# Altium PCB base-board.PcbDoc (part 2 of 2)
Units mil, origin at the board's own origin, x right, y up, seen from the top; angles counter-clockwise.
Board outline 2347.19 x 3917.24 mil, 2 copper layers (Top Layer, Bottom Layer); 55 components, 32 nets, 216 pads, 60 vias.
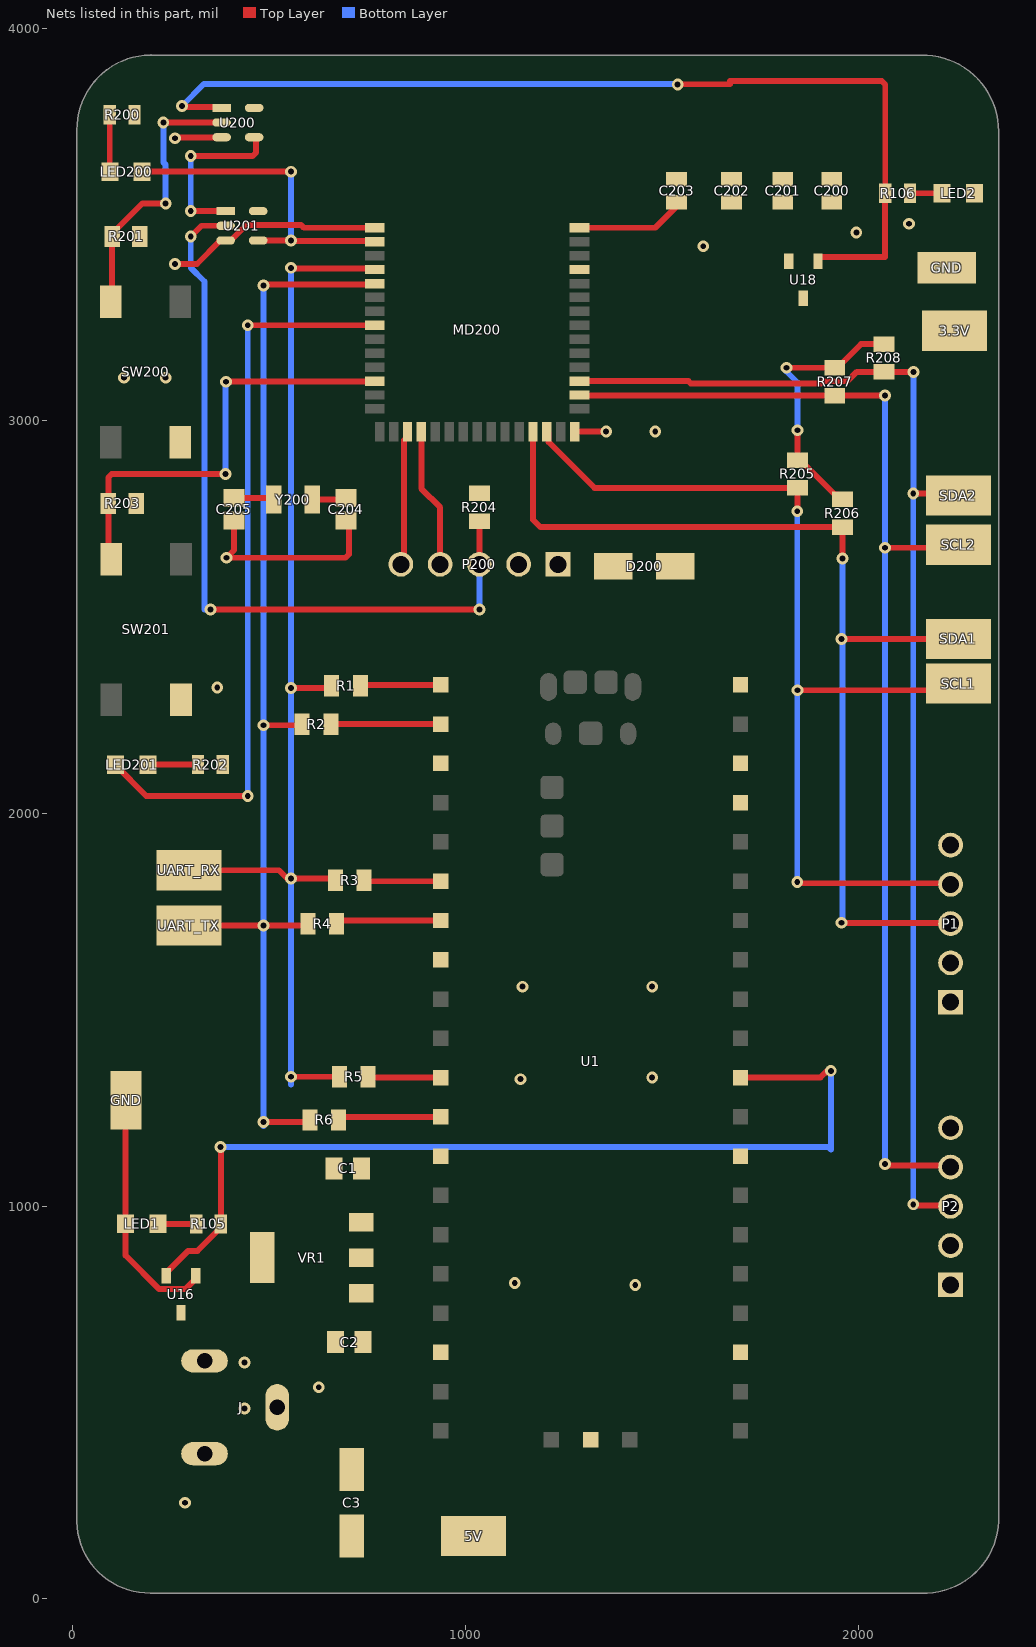
[diagram p2: the nets of this part, all layers, seen from the top]

## Part data
3.3V 5V SCL1 SCL2 SDA1 SDA2 UART_RX UART_TX: "Test Point SMD 1206", Case Size=1206, Manufacturer="TE Connectivity (Tyco Electronics)", Manufacturer Part Number=1625854-1, Operating Temperature="-55 to 125 C", Power Rating=N/R, Resistance Value="0 Ohm", Supplier Part Number=A106143CT-ND, ComponentLink1Description=https://datasheet.ciiva.com/6439/eng-ds-1773266-a-6439169.pdf, ComponentLink1URL=https://datasheet.ciiva.com/6439/eng-ds-1773266-a-6439169.pdf, ComponentLink2Description=https://datasheet.ciiva.com/30136/1773266-a-30136341.pdf, ComponentLink2URL=https://datasheet.ciiva.com/30136/1773266-a-30136341.pdf, ComponentLink3Description=https://datasheet.ciiva.com/6439/eng-ds-1773266-a-6439080.pdf, ComponentLink3URL=https://datasheet.ciiva.com/6439/eng-ds-1773266-a-6439080.pdf, ComponentLink4Description=https://datasheet.ciiva.com/6439/eng-ds-1773266-a-6439081.pdf, ComponentLink4URL=https://datasheet.ciiva.com/6439/eng-ds-1773266-a-6439081.pdf, ComponentLink5Description=https://datasheet.ciiva.com/6439/eng-ds-1773266-a-6439083.pdf, ComponentLink5URL=https://datasheet.ciiva.com/6439/eng-ds-1773266-a-6439083.pdf, Dimension="3.2 x 1.6 x 1.25mm", Family=RC, Mounting="Surface Mount", Packaging="Tape and Reel", Part No=1625854-1, Pricing 1="1=0.28, 10=0.261, 25=0.224, 50=0.1902, 100=0.1828, 250=0.1641, 500=0.1567, 1000=0.1306 (USD)", RoHS=Yes, Stock 1=31937, Supplier=Digi-Key, Temperature Coefficient=N/R, Terminal Pitch=N/R, Termination Style=N/R, Tolerance=N/R
C1 C2: "10ÂµF Â±10% 16V Ceramic Capacitor X5R 0805 _2012 Metric_", Package="0805 Samsung", Digi-Key_Part_Number=1276-6455-1-ND, Digi-Key_Purchase_URL=https://www.digikey.com/product-detail/en/samsung-electro-mechanics/CL21A106KOQNNNG/1276-6455-1-ND/5958083?utm_source=snapeda&utm_medium=aggregator&utm_campaign=symbol, MF="Samsung Electro-Mechanics", MP=CL21A106KOQNNNG, SnapEDA_Link=https://www.snapeda.com/parts/CL21A106KOQNNNG/Samsung%20Electro-Mechanics/view-part/3597829/?ref=snap
C3: library part CMP-05427-000047-1, "CAP ALUM 100UF 20% 10V SMD", Capacitance=100uF, Case/Package=Radial, Max Operating Temperature=85°C, Min Operating Temperature=-40°C, Package Quantity=1, Ripple Current=50mA, Tolerance=20%, Voltage Rating=10V, Construction=Cylindrical, Contact Plating=Tin, Diameter=5mm, Height=5.4mm, Height - Seated (Max)=0.213inch, Lead Free="Lead Free", Length=5.5mm, Life (Hours)=1000Hour, Mount="Surface Mount", Packaging="Tape and Reel", Radiation Hardening=No, Ripple Current (AC)=50mA, RoHS Compliant=Yes, Series=S, Termination=SMD/SMT, Voltage Rating (DC)=10V
C200 C201: library part CMP-2007-03243-2, "CAP CER 10UF 10V X5R 0805", 3DS Part Number=220-00001, Capacitance=10uF, Manufacturer=Kemet, Package=C0805C-DG, Temperature="-55°C to +85°C", Temperature Characteristic=X5R, Temperature Coefficient=15%, Temperature Range High=+85°C, Temperature Range Low=-55°C, Tolerance=10%, Voltage=10V, Automotive=No, Category=Cap, ComponentLink2Description=Datasheet, ComponentLink2URL=https://content.kemet.com/datasheets/KEM_C1006_X5R_SMD.pdf, Device Class L1="Passive Components", Device Class L2=Capacitors, Device Class L3="Ceramic Capacitors", Digikey Description="CAP CER 10UF 10V X5R 0805", Height=1.4mm, Ipc Land Pattern Name=CAPC200125X125, Lead Free=Yes, Manufacturer Part Number=C0805C106K8PACTU, Material=Ceramic, Mouser Description="CAP CER 10UF 10V X5R 0805", Octopart=https://octopart.com/c0805c106k8pactu-kemet-98697, RoHS=TRUE, Voltage Rating=10V
C202 C203: library part CMP-2007-00279-2, "CAP CER 0.1UF 50V X7R 0805", Capacitance="0.10 μF", Manufacturer=KEMET, Package=C0805C-DN, Temperature="-55°C to +125°C", Temperature Characteristic=X7R, Temperature Coefficient=30ppm/°C, Temperature Range High=+125°C, Temperature Range Low=-55°C, Tolerance=0.1, Voltage Rating="50 V", Automotive=No, Category=Cap, ComponentLink2Description=Datasheet, ComponentLink2URL=https://content.kemet.com/datasheets/KEM_C1003_C0G_SMD.pdf, Device Class L1="Passive Components", Device Class L2=Capacitors, Device Class L3="Ceramic Capacitors", Digikey Description="CAP CER 0.1UF 50V X7R 0805", Height=0.88mm, Ipc Land Pattern Name=CAPC200125X78, Lead Free=Yes, Manufacturer Part Number=C0805C104K5RACTU, Material=Ceramic, Mouser Description="Cap Ceramic 0.1uF 50V X7R 10% SMD 2.0 x 1.2 mm 125 C Paper T/R", Octopart=https://octopart.com/c0805c104k5ractu-kemet-143926, RoHS=TRUE
C204 C205: library part CMP-2007-04344-1, Manufacturer="AVX Interconnect / Elco", Part Number=08055A6R0CAT2A
D200: library part CMP-2000-05096-2, "DIODE SCHOTTKY 40V 1A SMA", Average Rectified Current=1A, Capacitance=110pF, Case/Package=SMA, Forward Voltage=500mV, Max Forward Surge Current (Ifsm)=30A, Max Operating Temperature=150°C, Max Repetitive Reverse Voltage (Vrrm)=40V, Max Reverse Current=500uA, Min Operating Temperature=-65°C, Package Quantity=5000, Contact Plating=Tin, Current Rating=1A, Element Configuration=Single, Forward Current=1A, Height=2.1mm, Lead Free="Lead Free", Length=4.6mm, Max Reverse Voltage (DC)=40V, Mount="Surface Mount", Number of Pins=2, Output Current=1A, Packaging="Cut Tape", Peak Non-Repetitive Surge Current=30A, Polarity=Standard, Radiation Hardening=No, REACH SVHC="No SVHC", RoHS Compliant=Yes, Series=B140, Termination=SMD/SMT, Voltage Rating (DC)=40V, Weight=0.004233oz, Width=2.92mm
GND GND: library part CMP-1672-00008-1, "Test Point, 1 Position SMD, RoHS, Tape and Reel", Package Quantity=1000, ComponentLink1Description="Manufacturer URL", ComponentLink1URL=http://www.keyelco.com/, ComponentLink2Description=Datasheet, ComponentLink2URL=http://www.keyelco.com/product-pdf.cfm?p=1357, Contact Plating=Silver, DatasheetVersion=03/2014, Mount="Surface Mount", Mounting Technology="Surface Mount", PackageDescription="1-Pin Surface Mount Device, Body 3.81 x 2.03 mm", PackageReference=5019, Packaging="Tape and Reel", Pins=1, RoHSCompliant=True
J: "2.0 x 6.5 mm, 5.0 A, Horizontal, Through Hole, Tapered Pins, Dc Power Jack Connector", Package=None, CUI_purchase_URL=https://www.cuidevices.com/product/interconnect/connectors/dc-power-connectors/jacks/pj-102ah?utm_source=snapeda.com&utm_medium=referral&utm_campaign=snapedaBOM, Digi-Key_Part_Number=CP-102AH-ND, Digi-Key_Purchase_URL=https://www.digikey.com/product-detail/en/cui-devices/PJ-102AH/CP-102AH-ND/408448?utm_source=snapeda&utm_medium=aggregator&utm_campaign=symbol, MF="CUI Devices", MP=PJ-102AH, SnapEDA_Link=https://www.snapeda.com/parts/PJ-102AH/CUI%20Devices/view-part/228264/?ref=snap
LED1 LED2 LED200: library part CMP-1426-00011-1, "SMD mono-color Chip LED, WL-SMCW, Red", Color=Red, Manufacturer="Wuerth Elektronik", ComponentLink1Description="Manufacturer URL", ComponentLink1URL=http://www.we-online.com, ComponentLink2Description=Datasheet, ComponentLink2URL=http://katalog.we-online.com/led/datasheet/150080RS75000.pdf, PackageReference=0805_A, PartNumber=150080RS75000
LED201: library part CMP-1426-00007-1, "SMD mono-color Chip LED, WL-SMCW, Green", Color=Green, Manufacturer="Wuerth Elektronik", ComponentLink1Description="Manufacturer URL", ComponentLink1URL=http://www.we-online.com, ComponentLink2Description=Datasheet, ComponentLink2URL=http://katalog.we-online.com/led/datasheet/150080GS75000.pdf, PackageReference=0805_A, PartNumber=150080GS75000
MD200: library part CMP-12964-000002-1, "RF TXRX MOD BLUETOOTH TRACE ANT", Manufacturer="Cypress Semiconductor", Max Frequency=2.5GHz, Max Supply Voltage=3.6V, Min Supply Voltage=1.71V, Package=0, Receiving Current=6.7mA, Temperature="-40°C to +85°C", Temperature Range High=+85°C, Temperature Range Low=-40°C, Transmitting Current=5.7mA, Automotive=No, Bandwidth=100MHz, Category=UNK, ComponentLink2Description=Datasheet, ComponentLink2URL=https://www.cypress.com/file/428336/download, Data Rate=2Mbits/s, Device Class L1="Integrated Circuits (ICs)", Device Class L2="RF Semiconductors and Devices", Device Class L3=Transceivers, Digikey Description="RF TXRX MOD BLUETOOTH TRACE ANT", Height=2mm, Interface=I2C,SPI,UART,I2S,Other, Lead Free=Yes, Manufacturer Part Number=CYBLE-416045-02, Number Of Adc Channels=1, Number Of Gpio=36, Octopart=https://octopart.com/cyble-416045-02-cypress+semiconductor-96386825, RoHS=TRUE
P1 P2 P200: library part CMP-1502-01068-1, "THT Vertical Pin Header WR-PHD, Pitch 2.54 mm, Single Row, 5 pins", Contact Resistance=20mOhm, Manufacturer="Wurth Elektronik", Operating Temperature=-40to105degC, Rated Current=3A, Withstanding Voltage=500VAC, Working Voltage=250VAC, Datasheet URL=https://katalog.we-online.de/em/datasheet/6130xx11121.pdf, Gender=Male, Manufacturer URL=http://www.we-online.de, Mounting Technology=THT, Orientation=Vertical, Package Reference=61300511121, Packaging=Bag, Part Number=61300511121, Pin Number=5, Pitch=2.54mm, Publisher=WurthElektronik, Row Number=Single
R1 R2 R3 R4 R5 R6: library part RMCF0805ZT0R00, "0 Ohms Jumper 0.125W, 1/8W Chip Resistor 0805 (2012 Metric) Automotive AEC-Q200 Thick Film", Package="0805 Stackpole Electronics", Availability=Unavailable, DigiKey-Purchase-URL=https://snapeda.com/shop?store=DigiKey&id=492501, MF="Stackpole Electronics", MP=RMCF0805ZT0R00, Price=None, SnapEDA_Link=https://www.snapeda.com/parts/RMCF0805ZT0R00/Stackpole%20Electronics%20Inc/view-part/492501/?ref=snap
R105 R106 R200 R202: library part CMP-2000-06960-1, "Chip Resistor, 330 Ohm, +/- 1%, 125 mW, -55 to 155 degC, 0805 (2012 Metric), RoHS, Tape and Reel", Case Code - in=0805, Case Code - mm=2012, Manufacturer=Yageo, Operating Temperature Range=-55Cto+155C, Package Description="2-Pin Surface Mounted Device, Body 2 x 1.25 mm", Power Rating=125mW(1/8W), Resistance=330Ohms, Temperature Coefficient=100PPM/C, Tolerance=1%, Voltage Rating=150V, Datasheet URL=http://www.yageo.com/documents/recent/PYu-RC_Group_51_RoHS_L_7.pdf, Datasheet Version="Rev. 7, 05/2017", Manufacturer URL=http://www.yageo.com/, Mounting Technology=SurfaceMount, Package Reference=0805, Packaging=Reel, Product=ThickFilmResistorsGeneralPurpose, Series=RC, Termination Style=SMD/SMT
R201 R203 R204 R205 R206 R207 R208: library part CMP-1659-00013-4, "Chip Resistor, 10 KOhm, +/- 1%, 0.125 W, -55 to 155 degC, 0805 (2012 Metric), RoHS, Tape and Reel", Manufacturer=Yageo, Max Operating Temperature="155 degC", Min Operating Temperature="-55 degC", Package Quantity=5000, Voltage Rating="150 V", ComponentLink1Description="Manufacturer URL", ComponentLink1URL=http://www.yageo.com/, ComponentLink2Description=Datasheet, ComponentLink2URL=http://www.yageo.com/documents/recent/PYu-RC_Group_51_RoHS_L_04.pdf, DatasheetVersion="Rev. 4, 02/2016", Height="0.5 mm", Length="2 mm", Mount="Surface Mount", Mounting Technology="Surface Mount", PackageDescription="2-Pin Surface Mounted Device, Body 2 x 1.25 mm", PackageReference=0805, Packaging="Tape and Reel", Pins=2, REACH SVHC="No SVHC", RoHSCompliant=true
SW200 SW201: library part CMP-2000-05602-2, "Swicth, SPST, 24 V, -35 to 85 degC, 4-Pin SMD, RoHS, Tape and Reel", Case\/Package=SMD/SMT, Contact Current Rating=50mA, Contact Resistance=100mOhm, Manufacturer="TE Connectivity", Max Operating Temperature=85degC, Max Voltage Rating (DC)=12V, Min Operating Temperature=-35degC, Operating Force=1.57N, Package Description="4-Pin Surface Mount Device, Body 6 x 6 mm, Pitch 4.5 mm", Package Quantity=750, Voltage Rating=24V, Actuator Length=0.055inch, Actuator Material=Polyamide, Contact Material=CopperAlloy, Contact Plating=Silver, Current Rating=50mA, Datasheet URL=http://www.te.com/commerce/DocumentDelivery/DDEController?Action=showdoc&DocId=Customer+Drawing%7F2-1437565-7%7FV%7Fpdf%7FEnglish%7FENG_CD_2-1437565-7_V.pdf%7F4-1437565-2, Datasheet Version="Rev. V, 02/2015", Electrical Life=100000Cycles, Illumination Type=Illuminated, Length=6mm, Manufacturer URL=http://www.te.com/, Mechanical Life=100000Cycles, Mount=SurfaceMount, Mounting Technology=SurfaceMount, Orientation=Straight, Package Reference=FSM4JSMA, Packaging=LoosePiece, REACH SVHC=Unknown, RoHSCompliant=true, Switch Travel=0.25mm, Termination=GullWing, Throw Configuration=SPST, Voltage Rating (DC)=24V, Width=6mm
U1: "RP2040 Raspberry Pi Pico - ARM Cortex-M0+ MCU 32-Bit Embedded Evaluation Board", Package=None, Availability=Unavailable, MP=SC0915, Price=None
U200 U201: library part CMP-04903-000082-1, "IC GATE AND 1CH 2-INP SOT23-5", Logic Function="AND GATE", RoHS Compliant=Yes
VR1: Package=None, Availability=Unavailable, MP=TS2937CW33_RPG, Price=None
Y200: library part CMP-2000-07587-2, "CRYSTAL 32.7680KHZ 6PF SMD", Case/Package=SMD/SMT, ESR (Equivalent Series Resistance)=55kR, Frequency=32.768kHz, Frequency Tolerance=20ppm, Load Capacitance=6pF, Max Operating Temperature=85°C, Min Operating Temperature=-40°C, Operating Frequency="32.768 kHz", Package Quantity=3000, Series Resistance=60kR, Depth=1.5mm, Height=0.035inch, Lead Free="Lead Free", Length=3.2mm, Mount="Surface Mount", Number of Pins=2, Packaging="Tape and Reel", Radiation Hardening=No, REACH SVHC="No SVHC", RoHS Compliant=Yes, Series=ABS07, Termination=SMD/SMT, Tolerance=20ppm, Width=0.061inch

## Via types
v1: diameter 30, hole 15, Top Layer to Bottom Layer, 60 vias

## Nets (pads, with @x,y where several pads share a name; then routed paths per layer and width w, separated by ;. In a path a pad name is that pad's centre, name@x,y a point inside that pad or via, vN(x,y) a via of type N, cw(c..) or ccw(c..) an arc to the next point about the centre after c; other vN are vias at no path point)
3.3V: 3.3V.1 C1.2 C200.1 C201.1 C202.1 C203.1 D200.1 MD200.4 R200.2 R201.2 R203.2 R204.2 R205.1 R206.1 R207.1 R208.1 U18.3 U200.5 U201.5 VR1.3 | length 679.3
  Top Layer w15: v1(1817.24,3135.43) R207.1@1940,3135.43 1946.89,3135.43 2007.32,3195.87 R208.1@2065,3195.87 ; v1@1847.91,2973.35 v1(1845,2976.26) R205.1@1845,2900.43 1851.89,2900.43 1939.7,2812.62 1947.26,2812.62 R206.1@1959.45,2800.43
  Bottom Layer w15: v1(1817.24,3135.43) 1817.24,3125.96 1845,3098.21 v1(1845,2976.26)
3V3_PWR_GOOD: R106.2 U18.1 U200.1 | length 2552.7
  Top Layer w15: v1(277.55,3802.4) 280.05,3799.9 381.14,3799.9 U200.1@383.64,3797.4 ; v1(1540,3856.99) 1540.48,3857.47 1672.76,3857.47 1672.76,3865.71 2059.72,3865.71 2068.5,3856.92 R106.2@2068.5,3580 2067.95,3579.45 2067.95,3417.8 1901.71,3417.8 1897.4,3413.48 U18.1@1897.4,3407.24
  Bottom Layer w15: v1(277.55,3802.4) 333.35,3858.2 1538.79,3858.2 v1(1540,3856.99)
5V_PWR_GOOD: R105.2 U1.30 U16.2 | length 2394.2
  Top Layer w15: U16.2@237.6,823.19 237.6,831.06 293.17,886.63 316.99,886.63 376.5,946.14 R105.2@376.5,955 376.5,1150.05 v1(375.77,1150.77) v1@375.04,1151.5 ; U1.30@1699.92,1327.87 1903.4,1327.87 1920.53,1345 v1(1930,1345)
  Bottom Layer w15: v1(375.77,1150.77) 1924.23,1150.77 1930,1145 v1(1930,1345)
+5: 5V.1 C2.1 C3.2 J.1 P1.5 P2.5 U1.40 U16.3 VR1.1
GND: C1.1 C2.2 C3.1 C200.2 C201.2 C202.2 C203.2 C204.1 C205.1 GND.1 J.2 J.3 LED1.1 LED2.1 MD200.1 MD200.15 MD200.43 P1.1 P1.2 P2.1 P2.2 P200.2 R202.1 SW200.3 SW201.3 U1.3 U1.8 U1.13 U1.18 U1.23 U1.28 U1.37 U1.38 U1.D2 U16.1 U18.2 U200.3 U201.3 VR1.2 VR1.4 | length 2170.7
  Top Layer w15: GND.1@135,1270 133.66,1268.66 LED1.1@133.66,955.55 133.66,875.12 219.78,789 286.09,789 312.4,815.31 U16.1@312.4,823.19 ; v1(260,3400) 315.67,3400 375.39,3459.72 U201.3@388.64,3459.72 401.89,3459.72 441.39,3499.22 580.94,3499.22 588.04,3492.13 MD200.43@768.82,3492.13 ; v1(260,3720) 261.46,3721.46 382.5,3721.46 U200.3@383.64,3722.6 ; C205.1@410,2746.46 410,2671 v1(390.79,2651.79) 693.92,2651.79 702.71,2660.58 702.71,2738.75 C204.1@695,2746.46 ; MD200.15@1277.83,2972.87 1278.31,2973.35 v1(1357.8,2973.35) ; MD200.1@1290,3492.13 1482.79,3492.13 C203.2@1542.4,3551.73
  other v1: 285.3,245 437.03,485 625.94,539.17 437.03,602.01 1431.97,799.45 1125,804.45 1140,1323.76 1475,1327.87 1145,1559.37 1475,1559.37 367.28,2321.34 1482.79,2972.87 130,3110 236.02,3110 1605,3445 1995,3480 2128.73,3502.33
I2C1_SCL: MD200.17 P1.4 R205.2 SCL1.1 | length 2525.2
  Top Layer w15: MD200.17@1206.97,2972.87 1211.48,2968.37 1211.48,2946.29 1328.19,2829.57 R205.2@1845,2829.57 1845,2770.59 v1(1844.41,2770) ; v1(1844.41,1825.59) 1847.2,1822.8 2232.2,1822.8 P1.4@2235,1820 ; v1(1845,2314.33) 2238.27,2314.33 SCL1.1@2255,2331.06
  Bottom Layer w15: v1(1844.41,2770) v1(1844.41,1825.59) v1@1845,1825
I2C1_SDA: MD200.18 P1.3 R206.2 SDA1.1 | length 2598
  Top Layer w15: MD200.18@1171.54,2972.87 1171.54,2748.46 1190.43,2729.57 R206.2@1959.45,2729.57 v1@1959.45,2660 ; v1(1957.22,1722.22) 1958.34,1721.11 2233.89,1721.11 P1.3@2235,1720 ; v1(1957.22,2445) SDA1.1@2255,2445
  Bottom Layer w15: v1@1955,1720 v1(1957.22,1722.22) 1959.45,1724.45 v1(1959.45,2650)
I2C2_SCL: MD200.13 P2.4 R207.2 SCL2.1 | length 3100.1
  Top Layer w15: MD200.13@1290,3066.14 1290.79,3065.35 1939.21,3065.35 R207.2@1940,3064.57 v1(2067.95,3064.57) ; v1(2067.95,1107.95) 2071.93,1103.98 2231.02,1103.98 P2.4@2235,1100 ; v1(2067.95,2677.05) 2247.05,2677.05 SCL2.1@2255,2685
  Bottom Layer w15: v1@2065,1105 v1(2067.95,1107.95) v1(2067.95,2677.05) v1(2067.95,3064.57)
I2C2_SDA: MD200.12 P2.3 R208.2 SDA2.1 | length 3195.7
  Top Layer w15: MD200.12@1290,3101.57 1567.73,3101.57 1573.37,3095.93 1904.6,3095.93 1909.92,3101.25 1972.58,3101.25 1996.33,3125 R208.2@2065,3125 v1@2130,3125 ; v1(2140,1005) 2142.5,1002.5 2232.5,1002.5 P2.3@2235,1000 ; v1(2140,2815) 2250,2815 SDA2.1@2255,2810
  Bottom Layer w15: v1(2140.2,3125) 2140.2,2815.2 v1(2140,2815) v1(2140,1005) v1@2145,1000
NetLED1_2: LED1.2 R105.1 | length 117.2
  Top Layer w15: LED1.2@196.34,955 R105.1@313.5,955
NetLED2_2: LED2.2 R106.1 | length 82.2
  Top Layer w15: R106.1@2131.5,3580 LED2.2@2213.66,3580
NetR1_1: R1.1 U1.1 | length 206.3
  Top Layer w15: R1.1@731.61,2325.39 734.09,2327.87 U1.1@936.93,2327.87
NetR2_1: R2.1 U1.2 | length 280.3
  Top Layer w15: R2.1@656.61,2227.87 U1.2@936.93,2227.87
NetR3_1: R3.1 U1.6 | length 196.2
  Top Layer w15: R3.1@741.61,1830 743.74,1827.87 U1.6@936.93,1827.87
NetR4_1: R4.1 U1.7 | length 268.6
  Top Layer w15: R4.1@671.61,1720 679.49,1727.87 U1.7@936.93,1727.87
NetR5_1: R5.1 U1.11 | length 186.2
  Top Layer w15: R5.1@751.61,1330 753.74,1327.87 U1.11@936.93,1327.87
NetR6_1: R6.1 U1.12 | length 263.6
  Top Layer w15: R6.1@676.61,1220 684.49,1227.87 U1.12@936.93,1227.87
P0_0: C204.2 Y200.1 | length 87.3
  Top Layer w15: Y200.1@609.21,2800 691.46,2800 C204.2@695,2803.54
P0_1: C205.2 Y200.2 | length 102.3
  Top Layer w15: C205.2@410,2803.54 507.24,2803.54 Y200.2@510.79,2800
PB_IN: MD200.32 R203.1 SW201.2 | length 1128.5
  Top Layer w15: SW201.2@97.83,2648.27 90,2656.1 R203.1@90,2790 90,2856.21 98.79,2865 v1(388.64,2865) ; v1(390,3100) 390.79,3100.79 768.03,3100.79 MD200.32@768.82,3101.57
  Bottom Layer w15: v1(388.64,2865) 388.64,3098.64 v1(390,3100)
PRG_RESET_N: P200.3 R204.1 U201.2 | length 1973.9
  Top Layer w15: v1(300,3470) 327.13,3497.13 U201.2@388.64,3497.13 ; v1(350,2520) v1(1035,2520) ; P200.3@1035,2635 R204.1@1035,2744.57
  Bottom Layer w15: v1(300,3470) 300,3390 335,3355 v1@335,2520 ; v1(1035,2520) P200.3@1035,2635
PSOC_UART_RX: MD200.40 R1.2 R3.2 R5.2 UART_RX.1 | length 2898.7
  Top Layer w15: UART_RX.1@305,1855.94 524.58,1855.94 545.53,1835 v1(555,1835) 663.39,1835 R3.2@668.39,1830 ; v1(555,1330) R5.2@678.39,1330 ; v1(555,2320) 652.99,2320 R1.2@658.39,2325.39 ; v1(555,3390) 557.09,3387.91 766.73,3387.91 MD200.40@768.82,3385.83
  Bottom Layer w15: 555,1310 v1(555,1330) v1(555,1835) v1(555,2320) v1(555,3390)
PSOC_UART_TX: MD200.39 R2.2 R4.2 R6.2 UART_TX.1 | length 3021.4
  Top Layer w15: UART_TX.1@224.99,1715 v1(485,1715) 593.39,1715 R4.2@598.39,1720 ; v1(485,1215) 598.39,1215 R6.2@603.39,1220 ; v1(485,2225) 580.51,2225 R2.2@583.39,2227.87 ; v1(485,3345) 487.5,3347.5 766.32,3347.5 MD200.39@768.82,3350
  Bottom Layer w15: v1@485,1205 v1(485,1215) v1(485,1715) v1(485,2225) v1(485,3345)
RESET1: U200.4 U201.1 | length 437.9
  Top Layer w15: v1(300,3534.53) U201.1@388.64,3534.53 ; v1(300,3675) 457.57,3675 466.36,3683.79 U200.4@466.36,3722.6
  Bottom Layer w15: v1(300,3534.53) v1(300,3675)
RESET_N: R201.1 SW200.2 U200.2 | length 704.5
  Top Layer w15: SW200.2@96.42,3304.13 99.57,3307.28 R201.1@99.57,3470 99.57,3476.89 176.89,3554.21 v1(236.02,3554.21) ; v1(230,3760) U200.2@383.64,3760
  Bottom Layer w15: v1(230,3760) 230,3658.93 236.02,3652.91 v1(236.02,3554.21)
SWDCLK: MD200.26 P200.4 | length 357.6
  Top Layer w15: MD200.26@887.28,2972.87 887.28,2827.79 935,2780.08 P200.4@935,2635
SWDIO: MD200.27 P200.5 | length 344.9
  Top Layer w15: P200.5@835,2635 842.93,2642.93 842.93,2950.96 851.85,2959.88 MD200.27@851.85,2972.87
USR_LED: LED201.2 MD200.36 | length 1893.1
  Top Layer w15: LED201.2@108.66,2125 108.66,2123.03 186.69,2045 v1(445,2045) ; v1(445,3243.7) MD200.36@768.82,3243.7
  Bottom Layer w15: v1(445,2045) v1(445,3243.7)
USR_LED_R: LED201.1 R202.2 | length 127.2
  Top Layer w15: LED201.1@191.34,2125 R202.2@318.5,2125
VTARG: D200.2 P200.1
XRES_N: LED200.1 MD200.42 U201.4 | length 865
  Top Layer w15: LED200.1@176.34,3635 v1(555,3635) ; U201.4@458.98,3459.72 U201.4@471.36,3459.72 v1(555,3459.72) 556.52,3458.21 767.3,3458.21 MD200.42@768.82,3456.69
  Bottom Layer w15: v1(555,3459.72) v1(555,3635)
XRES_N_R: LED200.2 R200.1 | length 145.1
  Top Layer w15: R200.1@93.5,3780 93.58,3779.92 93.58,3635.08 LED200.2@93.66,3635
pads on no net: MD200.2 MD200.3 MD200.5 MD200.6 MD200.7 MD200.8 MD200.9 MD200.10 MD200.11 MD200.14 MD200.16 MD200.19 MD200.20 MD200.21 MD200.22 MD200.23 MD200.24 MD200.25 MD200.28 MD200.29 MD200.30 MD200.31 MD200.33 MD200.34 MD200.35 MD200.37 MD200.38 MD200.41 SW200.1 SW200.4 SW201.1 SW201.4 U1.4 U1.5 U1.9 U1.10 U1.14 U1.15 U1.16 U1.17 U1.19 U1.20 U1.21 U1.22 U1.24 U1.25 U1.26 U1.27 U1.29 U1.31 U1.32 U1.33 U1.34 U1.35 U1.36 U1.39 U1.A U1.B U1.C U1.D U1.D1 U1.D3 U1.TP1 U1.TP2 U1.TP3 U1.TP4 U1.TP5 U1.TP6

## Polygon pours and split planes (outlines as drawn)
+5 on Top Layer "+5_L01_P013" (solid, pour order 13): 305.31,758.84 302.03,755.55 5,755.55 5,45 25,25 27.17,27.17 2282.17,27.17 2335,80 2335,2380 1448.34,2380 1274.62,2206.28 1274.62,916.5
GND on Top Layer "GND_L01_P010" (solid, pour order 10): 699.69,1034.82 699.69,1132.48 704.7,1137.5 775.47,1137.5 775.47,995.9 775.87,995.5 699.69,995.5 699.69,918.15 785,918.15 785,834.53 775.87,825.39 684.49,825.39 684.49,753.78 678.39,747.68 710,716.06 710,463.19 790,383.19 790,251.89 461.89,251.89 390,180 110,180 110,310 105,315 100,475 400.93,475 400.93,727.85 348.78,780 290,780 290,860 295,865 410,865 410,932.85 437.03,959.88 535,959.88 535,923.76 540.61,918.15 625,918.15 625,1034.82
GND on Top Layer "GND_L01_P004" (solid, pour order 4): 851.85,1685 851.85,1580 1025,1580 1025,1185 1020,1190 850,1190 850,1085 845,1080 1030,1080 1030,690 1020,680 865,680 865,585 860,580 865,575 1275,575 1275,329.65 1270,324.65 1375,324.65 1375,570 1380,575 1785,575 1785,670 1790,675 1785,680 1600,680 1600,1070 1605,1075 1790,1075 1790,1175 1800,1185 1590,1185 1590,1975 1595,1980 1795,1980 1795,2170 1785,2180 1485,2180 1485,1878.74 1376.26,1770 1371.26,1775 1145,1775 1145,2190 1140,2185 851.85,2185 851.85,2080 1050,2080 1050,1680 1045,1685
3.3V on Top Layer "3.3V_L01_P015" (solid, pour order 15): 619.36,1054.6 611.98,1061.98 252.69,1061.98 252.69,1535.57 251.53,1534.41 5,1534.41 5,3920 -10,3935 2360,3935 2360,2525 2290,2455 835,2455 835,1231.81 807.5,1204.31 810,1201.81 810,922.15 692.59,922.15 690.48,924.26 690.48,995.5 780.43,996.38 775.47,1001.34 775.47,1137.5 704.7,1137.5 699.69,1132.48 699.69,1054.6
GND on Top Layer "GND_L01_P002" (solid, pour order 2): 1260,3009.87 1256.54,3006.41 1256.54,2935.87 1560,2935.87 1562.5,2938.37 1562.5,3008.87
GND on Top Layer "GND_L01_P008" (solid, pour order 8): 60.45,2892.53 322.32,2892.53 323.28,2891.57 323.28,3208.27 60.45,3208.27
GND on Top Layer "GND_L01_P007" (solid, pour order 7): 350,2074.61 422.28,2074.61 422.28,2352.28 404.56,2370 35,2370 35,2203.19 52.81,2185.38 345.13,2185.38
VTARG on Top Layer "VTARG_L01_P011" (solid, pour order 11): 1455,2710 1455,2555 1190,2555 1190,2670 1230,2710
GND on Top Layer "GND_L01_P009" (solid, pour order 9): 1965,3585 1959.45,3579.45 1505,3579.45 1505,3395 1500,3390 1504.17,3385.83 2094.17,3385.83 2145,3335 2330,3335 2330,3645 2255,3570 2255,3540 1970,3540 1965,3535
GND on Bottom Layer "GND_L02_P014" (solid, pour order 14): 10,3920 10,10 5,5 2370,5 2370,3940

## Keep-outs
Keep-Out Layer:
  lines w10: 10.01,196.92 ccw(c194.35,199.35) 10.01,196.88 ccw(c194.35,199.35) 196.78,15.01 cw(c196.85,10) 196.85,15.02 ; 10.01,3740.16 ccw(c5,3740.16) 10.01,3740.25 ; 10.01,3740.22 cw(c199.35,3742.66) 10.01,3740.25 ; 200,3931.99 cw(c200,3937.01) 198.43,3932.25 cw(c196.85,3937.01) 196.91,3931.99 ccw(c199.35,3742.66) 10.01,3740.25 ; 2160.35,15.02 cw(c2160.35,10) 2160.58,15.01 ccw(c2167.85,204.35) 2357.19,196.95 ; 2171.66,3931.92 cw(c2174.06,3742.59) 2363.4,3745.02 ; 5,196.85 ccw(c194.35,199.35) 196.85,10 cw(c194.35,199.35) 5,196.85 ; 5,3740.16 cw(c199.35,3742.66) 196.85,3937.01 ccw(c199.35,3742.66) 5,3740.16

## Silkscreen, mask and mechanical layers (free items; w line width, h text height)
Top Overlay:
  drawing of 2014 lines, arcs and shapes, not listed
  text "RST" at 113.94,3574.98 h15
  text "3.3 OK" at 2225,3525 h15
  text "NEXT_MOVE" at 90.54,2052.5 h15
  text "+5" at 2319.98,1935 h15 r270
  text "SCL1" at 2319.98,1850 h15 r270
  text "SDA1" at 2319.98,1750 h15 r270
  text "GND" at 2319.98,1645 h15 r270
  text "GND" at 2319.98,1535 h15 r270
  text "+5" at 2325,1215 h15 r270
  text "SCL2" at 2325,1130 h15 r270
  text "SDA2" at 2325,1030 h15 r270
  text "GND" at 2325,925 h15 r270
  text "GND" at 2325,815 h15 r270
Mechanical 2:
  lines w10: 5,196.85 ccw(c194.35,199.35) 196.85,10 ; 5,3740.16 cw(c199.35,3742.66) 196.85,3937.01 ; 2160.35,10 ccw(c2167.85,204.35) 2362.2,196.85 ; 2160.35,3937.01 cw(c2162.85,3737.66) 2362.2,3740.16

## Text inside footprints (layer, text, board x,y; h text height)
P1: Top Overlay "5" at 2168.07,1905.04 h40 r90; Top Overlay "1" at 2168.07,1515.28 h40 r90
P2: Top Overlay "5" at 2168.07,1185.04 h40 r90; Top Overlay "1" at 2168.07,795.28 h40 r90
P200: Top Overlay "1" at 1239.72,2568.07 h40 r180; Top Overlay "5" at 849.96,2568.07 h40 r180